# EAGLE board BMS Segment rev15 - Copy (EAGLE 9.6.2)

Size 108 x 240.25 mm. Coordinates in mm from the lower left corner, seen from the top.
Outline: 9,223.93 9,183.93 0,183.93 0,143.99 9,143.99 9,103.99 0,103.99 0,64.05 9,64.05 9,22.77 0,22.77 0,0 95.3,0 95.3,28.7 108,28.7 108,212.82 95.3,212.82 95.3,240.25 0,240.25 0,223.93 9,223.93
Copper layers (1*16): Top 0.035mm / dielectric 1.5mm / Bottom 0.035mm
Design rules "Advanced Circuits (2 Layer) *": minimum track width 5mil, minimum drill 10mil, track to track 5mil, track to pad 5mil, pad to pad 5mil, via to via 5mil, smd to smd 5mil, copper to edge 10mil, drill to drill 6mil, minimum pad ring 7mil, minimum via ring 5mil, stop-mask expansion 2.5mil, vias tented up to drill 30mil, thermal gap 10mil
Net classes: 1 unfused_hv: clearance 0.025 mm to class 0, clearance 3.2 mm

## Footprints (pad centres in the part's own frame; a part is rotated, then mirrored left to right if it is on the bottom)
0603-CAP = smd 0.9 x 0.9: 1 -0.75,0; 2 0.75,0
0603-LED = smd 0.8 x 0.8: 1 -0.825,0; 2 0.825,0
SOT-23 = smd 0.711 x 0.889: 1 -0.94,-1.003; 2 0.94,-1.003; 3 0,1.003
0603-RES = smd 0.9 x 0.8: 1 -0.85,0; 2 0.85,0
PWR163 = smd 1.651 x 3.81: 1 -2.54,-7.366; 2 2.54,-7.366 | smd 7.874 x 8.509: PAD 0,0
0885 = smd 5.6 x 7.23: 1 -5,0; 2 5,0
807-22-001-10-02X101 = drill 0.737 pad 1.829: 1 0,0
MOLEX_NANOFIT_SMD_VERTICAL_02 = smd 1.24 x 7: 1 1.25,0; 2 -1.25,0 | smd 1.1 x 8: PAD 3.055,0; PAD1 -3.055,0
SOT223 = smd 1.2 x 1.6: 1 -2.3,-3.2; 2 0,-3.2; 3 2.3,-3.2 | smd 3.3 x 1.6: 4 0,3.2
HM2102NLT = smd 1.016 x 1.714: 1 -5.016,-6.89; 2 -3.01,-6.89; 3 -1.003,-6.89; 4 1.003,-6.89; 5 3.01,-6.89; 6 5.016,-6.89; 7 5.016,6.89; 8 3.01,6.89; 9 1.003,6.89; 10 -1.003,6.89; 11 -3.01,6.89; 12 -5.016,6.89
LQFP-64 = smd 1.3 x 0.3: 1 -5.75,3.75; 2 -5.75,3.25; 3 -5.75,2.75; 4 -5.75,2.25; 5 -5.75,1.75; 6 -5.75,1.25; 7 -5.75,0.75; 8 -5.75,0.25; 9 -5.75,-0.25; 10 -5.75,-0.75; 11 -5.75,-1.25; 12 -5.75,-1.75; 13 -5.75,-2.25; 14 -5.75,-2.75; 15 -5.75,-3.25; 16 -5.75,-3.75; 33 5.75,-3.75; 34 5.75,-3.25; 35 5.75,-2.75; 36 5.75,-2.25; 37 5.75,-1.75; 38 5.75,-1.25; 39 5.75,-0.75; 40 5.75,-0.25; 41 5.75,0.25; 42 5.75,0.75; 43 5.75,1.25; 44 5.75,1.75; 45 5.75,2.25; 46 5.75,2.75; 47 5.75,3.25; 48 5.75,3.75 | smd 0.3 x 1.3: 17 -3.75,-5.75; 18 -3.25,-5.75; 19 -2.75,-5.75; 20 -2.25,-5.75; 21 -1.75,-5.75; 22 -1.25,-5.75; 23 -0.75,-5.75; 24 -0.25,-5.75; 25 0.25,-5.75; 26 0.75,-5.75; 27 1.25,-5.75; 28 1.75,-5.75; 29 2.25,-5.75; 30 2.75,-5.75; 31 3.25,-5.75; 32 3.75,-5.75; 49 3.75,5.75; 50 3.25,5.75; 51 2.75,5.75; 52 2.25,5.75; 53 1.75,5.75; 54 1.25,5.75; 55 0.75,5.75; 56 0.25,5.75; 57 -0.25,5.75; 58 -0.75,5.75; 59 -1.25,5.75; 60 -1.75,5.75; 61 -2.25,5.75; 62 -2.75,5.75; 63 -3.25,5.75; 64 -3.75,5.75 | smd 5.74 x 5.74: 65 0,0
M4_MOUNTING = hole 4.5: 0,0

## Placement (x,y rotation side)
C1  [0603-CAP]  -134.62,-1016.63 0 top  (outside the outline)
C2  [0603-CAP]  -134.62,-1019.49 0 top  (outside the outline)
C3  [0603-CAP]  -134.62,-1022.35 0 top  (outside the outline)
C4  [0603-CAP]  -134.62,-1025.21 0 top  (outside the outline)
C5  [0603-CAP]  -134.62,-1030.92 0 top  (outside the outline)
C6  [0603-CAP]  -174.62,992.19 0 top  (outside the outline)
C7  [0603-CAP]  -134.62,-1033.78 0 top  (outside the outline)
C8  [0603-CAP]  -134.62,-1036.64 0 top  (outside the outline)
C9  [0603-CAP]  -134.62,-1039.49 0 top  (outside the outline)
C10  [0603-CAP]  -155.57,-1082.04 0 top  (outside the outline)
CELL1:C1  [0603-CAP]  -155.57,-1084.9 0 top  (outside the outline)
CELL1:D1  [0603-LED]  -156.21,-1087.76 0 top  (outside the outline)
CELL1:Q1  TRANSISTOR_P_MOS_SOT23_SI2369DS-T1-GE3  [SOT-23]  -161.29,-1086.8 0 top  (outside the outline)
CELL1:R1  RESISTOR_0603_100  [0603-RES]  -161.29,-1090.61 0 top  (outside the outline)
CELL1:R2  RESISTOR_0603_3.3K  [0603-RES]  -161.93,-1093.47 0 top  (outside the outline)
CELL1:R3  RESISTOR_PWR163_5  [PWR163]  -170.18,-1084.26 0 top  (outside the outline)
CELL1:R4  RESISTOR_0603_1K  [0603-RES]  -173.04,-1096.33 0 top  (outside the outline)
CELL2:C1  [0603-CAP]  -173.04,582.29 0 top  (outside the outline)
CELL2:D1  [0603-LED]  -166.69,582.29 0 top  (outside the outline)
CELL2:Q1  TRANSISTOR_P_MOS_SOT23_SI2369DS-T1-GE3  [SOT-23]  -163.19,566.42 0 top  (outside the outline)
CELL2:R1  RESISTOR_0603_100  [0603-RES]  -173.04,585.15 0 top  (outside the outline)
CELL2:R2  RESISTOR_0603_3.3K  [0603-RES]  -166.69,585.15 0 top  (outside the outline)
CELL2:R3  RESISTOR_PWR163_5  [PWR163]  -170.81,574.99 0 top  (outside the outline)
CELL2:R4  RESISTOR_0603_1K  [0603-RES]  -173.04,588.01 0 top  (outside the outline)
CELL3:C1  [0603-CAP]  -173.04,607.38 0 top  (outside the outline)
CELL3:D1  [0603-LED]  -166.69,607.38 0 top  (outside the outline)
CELL3:Q1  TRANSISTOR_P_MOS_SOT23_SI2369DS-T1-GE3  [SOT-23]  -163.19,591.82 0 top  (outside the outline)
CELL3:R1  RESISTOR_0603_100  [0603-RES]  -173.04,610.24 0 top  (outside the outline)
CELL3:R2  RESISTOR_0603_3.3K  [0603-RES]  -166.69,610.24 0 top  (outside the outline)
CELL3:R3  RESISTOR_PWR163_5  [PWR163]  -170.81,600.08 0 top  (outside the outline)
CELL3:R4  RESISTOR_0603_1K  [0603-RES]  -173.04,613.09 0 top  (outside the outline)
CELL4:C1  [0603-CAP]  -173.04,632.46 0 top  (outside the outline)
CELL4:D1  [0603-LED]  -166.69,632.46 0 top  (outside the outline)
CELL4:Q1  TRANSISTOR_P_MOS_SOT23_SI2369DS-T1-GE3  [SOT-23]  -163.19,616.9 0 top  (outside the outline)
CELL4:R1  RESISTOR_0603_100  [0603-RES]  -173.04,635.32 0 top  (outside the outline)
CELL4:R2  RESISTOR_0603_3.3K  [0603-RES]  -166.69,635.32 0 top  (outside the outline)
CELL4:R3  RESISTOR_PWR163_5  [PWR163]  -170.81,625.16 0 top  (outside the outline)
CELL4:R4  RESISTOR_0603_1K  [0603-RES]  -173.04,638.17 0 top  (outside the outline)
CELL5:C1  [0603-CAP]  -173.04,657.54 0 top  (outside the outline)
CELL5:D1  [0603-LED]  -166.69,657.54 0 top  (outside the outline)
CELL5:Q1  TRANSISTOR_P_MOS_SOT23_SI2369DS-T1-GE3  [SOT-23]  -163.19,641.99 0 top  (outside the outline)
CELL5:R1  RESISTOR_0603_100  [0603-RES]  -173.04,660.4 0 top  (outside the outline)
CELL5:R2  RESISTOR_0603_3.3K  [0603-RES]  -166.69,660.4 0 top  (outside the outline)
CELL5:R3  RESISTOR_PWR163_5  [PWR163]  -170.81,650.24 0 top  (outside the outline)
CELL5:R4  RESISTOR_0603_1K  [0603-RES]  -173.04,663.26 0 top  (outside the outline)
CELL6:C1  [0603-CAP]  -173.04,682.62 0 top  (outside the outline)
CELL6:D1  [0603-LED]  -166.69,682.62 0 top  (outside the outline)
CELL6:Q1  TRANSISTOR_P_MOS_SOT23_SI2369DS-T1-GE3  [SOT-23]  -163.19,667.07 0 top  (outside the outline)
CELL6:R1  RESISTOR_0603_100  [0603-RES]  -173.04,685.48 0 top  (outside the outline)
CELL6:R2  RESISTOR_0603_3.3K  [0603-RES]  -166.69,685.48 0 top  (outside the outline)
CELL6:R3  RESISTOR_PWR163_5  [PWR163]  -170.81,675.32 0 top  (outside the outline)
CELL6:R4  RESISTOR_0603_1K  [0603-RES]  -173.04,688.34 0 top  (outside the outline)
CELL7:C1  [0603-CAP]  -173.04,707.71 0 top  (outside the outline)
CELL7:D1  [0603-LED]  -166.69,707.71 0 top  (outside the outline)
CELL7:Q1  TRANSISTOR_P_MOS_SOT23_SI2369DS-T1-GE3  [SOT-23]  -163.19,692.15 0 top  (outside the outline)
CELL7:R1  RESISTOR_0603_100  [0603-RES]  -173.04,710.57 0 top  (outside the outline)
CELL7:R2  RESISTOR_0603_3.3K  [0603-RES]  -166.69,710.57 0 top  (outside the outline)
CELL7:R3  RESISTOR_PWR163_5  [PWR163]  -170.81,700.4 0 top  (outside the outline)
CELL7:R4  RESISTOR_0603_1K  [0603-RES]  -173.04,713.42 0 top  (outside the outline)
CELL8:C1  [0603-CAP]  -173.04,732.79 0 top  (outside the outline)
CELL8:D1  [0603-LED]  -166.69,732.79 0 top  (outside the outline)
CELL8:Q1  TRANSISTOR_P_MOS_SOT23_SI2369DS-T1-GE3  [SOT-23]  -163.19,717.23 0 top  (outside the outline)
CELL8:R1  RESISTOR_0603_100  [0603-RES]  -173.04,735.65 0 top  (outside the outline)
CELL8:R2  RESISTOR_0603_3.3K  [0603-RES]  -166.69,735.65 0 top  (outside the outline)
CELL8:R3  RESISTOR_PWR163_5  [PWR163]  -170.81,725.49 0 top  (outside the outline)
CELL8:R4  RESISTOR_0603_1K  [0603-RES]  -173.04,738.5 0 top  (outside the outline)
CELL9:C1  [0603-CAP]  -173.04,757.87 0 top  (outside the outline)
CELL9:D1  [0603-LED]  -166.69,757.87 0 top  (outside the outline)
CELL9:Q1  TRANSISTOR_P_MOS_SOT23_SI2369DS-T1-GE3  [SOT-23]  -163.19,742.32 0 top  (outside the outline)
CELL9:R1  RESISTOR_0603_100  [0603-RES]  -173.04,760.73 0 top  (outside the outline)
CELL9:R2  RESISTOR_0603_3.3K  [0603-RES]  -166.69,760.73 0 top  (outside the outline)
CELL9:R3  RESISTOR_PWR163_5  [PWR163]  -170.81,750.57 0 top  (outside the outline)
CELL9:R4  RESISTOR_0603_1K  [0603-RES]  -173.04,763.59 0 top  (outside the outline)
CELL10:C1  [0603-CAP]  -172.4,782.96 0 top  (outside the outline)
CELL10:D1  [0603-LED]  -165.42,782.96 0 top  (outside the outline)
CELL10:Q1  TRANSISTOR_P_MOS_SOT23_SI2369DS-T1-GE3  [SOT-23]  -162.88,767.4 0 top  (outside the outline)
CELL10:R1  RESISTOR_0603_100  [0603-RES]  -172.4,785.81 0 top  (outside the outline)
CELL10:R2  RESISTOR_0603_3.3K  [0603-RES]  -165.42,785.81 0 top  (outside the outline)
CELL10:R3  RESISTOR_PWR163_5  [PWR163]  -170.81,775.65 0 top  (outside the outline)
CELL10:R4  RESISTOR_0603_1K  [0603-RES]  -172.4,788.67 0 top  (outside the outline)
CELL11:C1  [0603-CAP]  -172.4,808.04 0 top  (outside the outline)
CELL11:D1  [0603-LED]  -165.42,808.04 0 top  (outside the outline)
CELL11:Q1  TRANSISTOR_P_MOS_SOT23_SI2369DS-T1-GE3  [SOT-23]  -162.88,792.48 0 top  (outside the outline)
CELL11:R1  RESISTOR_0603_100  [0603-RES]  -172.4,810.89 0 top  (outside the outline)
CELL11:R2  RESISTOR_0603_3.3K  [0603-RES]  -165.42,810.89 0 top  (outside the outline)
CELL11:R3  RESISTOR_PWR163_5  [PWR163]  -170.81,800.74 0 top  (outside the outline)
CELL11:R4  RESISTOR_0603_1K  [0603-RES]  -172.4,813.75 0 top  (outside the outline)
CELL12:C1  [0603-CAP]  -172.4,833.12 0 top  (outside the outline)
CELL12:D1  [0603-LED]  -165.42,833.12 0 top  (outside the outline)
CELL12:Q1  TRANSISTOR_P_MOS_SOT23_SI2369DS-T1-GE3  [SOT-23]  -162.88,817.56 0 top  (outside the outline)
CELL12:R1  RESISTOR_0603_100  [0603-RES]  -172.4,835.98 0 top  (outside the outline)
CELL12:R2  RESISTOR_0603_3.3K  [0603-RES]  -165.42,835.98 0 top  (outside the outline)
CELL12:R3  RESISTOR_PWR163_5  [PWR163]  -170.81,825.82 0 top  (outside the outline)
CELL12:R4  RESISTOR_0603_1K  [0603-RES]  -172.4,838.84 0 top  (outside the outline)
CELL13:C1  [0603-CAP]  -172.4,858.2 0 top  (outside the outline)
CELL13:D1  [0603-LED]  -165.42,858.2 0 top  (outside the outline)
CELL13:Q1  TRANSISTOR_P_MOS_SOT23_SI2369DS-T1-GE3  [SOT-23]  -162.88,842.64 0 top  (outside the outline)
CELL13:R1  RESISTOR_0603_100  [0603-RES]  -172.4,861.06 0 top  (outside the outline)
CELL13:R2  RESISTOR_0603_3.3K  [0603-RES]  -165.42,861.06 0 top  (outside the outline)
CELL13:R3  RESISTOR_PWR163_5  [PWR163]  -170.81,850.9 0 top  (outside the outline)
CELL13:R4  RESISTOR_0603_1K  [0603-RES]  -172.4,863.92 0 top  (outside the outline)
CELL14:C1  [0603-CAP]  -172.4,883.28 0 top  (outside the outline)
CELL14:D1  [0603-LED]  -165.42,883.28 0 top  (outside the outline)
CELL14:Q1  TRANSISTOR_P_MOS_SOT23_SI2369DS-T1-GE3  [SOT-23]  -162.88,867.73 0 top  (outside the outline)
CELL14:R1  RESISTOR_0603_100  [0603-RES]  -172.4,886.14 0 top  (outside the outline)
CELL14:R2  RESISTOR_0603_3.3K  [0603-RES]  -165.42,886.14 0 top  (outside the outline)
CELL14:R3  RESISTOR_PWR163_5  [PWR163]  -170.81,875.98 0 top  (outside the outline)
CELL14:R4  RESISTOR_0603_1K  [0603-RES]  -172.4,889 0 top  (outside the outline)
CELL15:C1  [0603-CAP]  -172.4,908.37 0 top  (outside the outline)
CELL15:D1  [0603-LED]  -165.42,908.37 0 top  (outside the outline)
CELL15:Q1  TRANSISTOR_P_MOS_SOT23_SI2369DS-T1-GE3  [SOT-23]  -162.88,892.81 0 top  (outside the outline)
CELL15:R1  RESISTOR_0603_100  [0603-RES]  -172.4,911.23 0 top  (outside the outline)
CELL15:R2  RESISTOR_0603_3.3K  [0603-RES]  -165.42,911.23 0 top  (outside the outline)
CELL15:R3  RESISTOR_PWR163_5  [PWR163]  -170.81,901.07 0 top  (outside the outline)
CELL15:R4  RESISTOR_0603_1K  [0603-RES]  -172.4,914.08 0 top  (outside the outline)
CELL16:C1  [0603-CAP]  -172.4,933.45 0 top  (outside the outline)
CELL16:D1  [0603-LED]  -165.42,933.45 0 top  (outside the outline)
CELL16:Q1  TRANSISTOR_P_MOS_SOT23_SI2369DS-T1-GE3  [SOT-23]  -162.88,917.89 0 top  (outside the outline)
CELL16:R1  RESISTOR_0603_100  [0603-RES]  -172.4,936.31 0 top  (outside the outline)
CELL16:R2  RESISTOR_0603_3.3K  [0603-RES]  -165.42,936.31 0 top  (outside the outline)
CELL16:R3  RESISTOR_PWR163_5  [PWR163]  -170.81,926.15 0 top  (outside the outline)
CELL16:R4  RESISTOR_0603_1K  [0603-RES]  -172.4,939.16 0 top  (outside the outline)
CELL17:C1  [0603-CAP]  -172.4,958.53 0 top  (outside the outline)
CELL17:D1  [0603-LED]  -165.42,958.53 0 top  (outside the outline)
CELL17:Q1  TRANSISTOR_P_MOS_SOT23_SI2369DS-T1-GE3  [SOT-23]  -162.88,942.98 0 top  (outside the outline)
CELL17:R1  RESISTOR_0603_100  [0603-RES]  -172.4,961.39 0 top  (outside the outline)
CELL17:R2  RESISTOR_0603_3.3K  [0603-RES]  -165.42,961.39 0 top  (outside the outline)
CELL17:R3  RESISTOR_PWR163_5  [PWR163]  -170.81,951.23 0 top  (outside the outline)
CELL17:R4  RESISTOR_0603_1K  [0603-RES]  -172.4,964.25 0 top  (outside the outline)
CELL18:C1  [0603-CAP]  -172.4,983.62 0 top  (outside the outline)
CELL18:D1  [0603-LED]  -165.42,983.62 0 top  (outside the outline)
CELL18:Q1  TRANSISTOR_P_MOS_SOT23_SI2369DS-T1-GE3  [SOT-23]  -162.88,968.06 0 top  (outside the outline)
CELL18:R1  RESISTOR_0603_100  [0603-RES]  -172.4,986.47 0 top  (outside the outline)
CELL18:R2  RESISTOR_0603_3.3K  [0603-RES]  -165.42,986.47 0 top  (outside the outline)
CELL18:R3  RESISTOR_PWR163_5  [PWR163]  -170.81,976.31 0 top  (outside the outline)
CELL18:R4  RESISTOR_0603_1K  [0603-RES]  -172.4,989.33 0 top  (outside the outline)
F0  [0885]  -149.54,-1069.02 0 top  (outside the outline)
F1  [0885]  -149.54,317.5 0 top  (outside the outline)
F2  [0885]  -149.54,327.34 0 top  (outside the outline)
F3  [0885]  -149.54,337.19 0 top  (outside the outline)
F4  [0885]  -149.54,347.03 0 top  (outside the outline)
F5  [0885]  -149.54,356.87 0 top  (outside the outline)
F6  [0885]  -149.54,366.71 0 top  (outside the outline)
F7  [0885]  -149.54,376.56 0 top  (outside the outline)
F8  [0885]  -149.54,386.4 0 top  (outside the outline)
F9  [0885]  -149.54,396.24 0 top  (outside the outline)
F10  [0885]  -149.54,406.08 0 top  (outside the outline)
F11  [0885]  -149.54,415.93 0 top  (outside the outline)
F12  [0885]  -149.54,425.77 0 top  (outside the outline)
F13  [0885]  -149.54,435.61 0 top  (outside the outline)
F14  [0885]  -149.54,445.45 0 top  (outside the outline)
F15  [0885]  -149.54,455.3 0 top  (outside the outline)
F16  [0885]  -149.54,465.14 0 top  (outside the outline)
F17  [0885]  -149.54,474.98 0 top  (outside the outline)
F18  [0885]  -149.54,554.99 0 top  (outside the outline)
J0  CONNECTOR-1  [807-22-001-10-02X101]  -155.57,-1076.01 0 top  (outside the outline)
J1  CONNECTOR-1  [807-22-001-10-02X101]  -156.53,481.96 0 top  (outside the outline)
J2  CONNECTOR-1  [807-22-001-10-02X101]  -156.53,486.09 0 top  (outside the outline)
J3  CONNECTOR-1  [807-22-001-10-02X101]  -156.53,490.22 0 top  (outside the outline)
J4  CONNECTOR-1  [807-22-001-10-02X101]  -156.53,494.35 0 top  (outside the outline)
J5  CONNECTOR-1  [807-22-001-10-02X101]  -156.53,498.48 0 top  (outside the outline)
J6  CONNECTOR-1  [807-22-001-10-02X101]  -156.53,502.6 0 top  (outside the outline)
J7  CONNECTOR-1  [807-22-001-10-02X101]  -156.53,506.73 0 top  (outside the outline)
J8  CONNECTOR-1  [807-22-001-10-02X101]  -156.53,510.86 0 top  (outside the outline)
J9  CONNECTOR-1  [807-22-001-10-02X101]  -156.53,514.99 0 top  (outside the outline)
J10  CONNECTOR-1  [807-22-001-10-02X101]  -156.53,519.11 0 top  (outside the outline)
J11  CONNECTOR-1  [807-22-001-10-02X101]  -156.53,523.24 0 top  (outside the outline)
J12  CONNECTOR-1  [807-22-001-10-02X101]  -156.53,527.37 0 top  (outside the outline)
J13  CONNECTOR-1  [807-22-001-10-02X101]  -156.53,531.5 0 top  (outside the outline)
J14  CONNECTOR-1  [807-22-001-10-02X101]  -156.53,535.62 0 top  (outside the outline)
J15  CONNECTOR-1  [807-22-001-10-02X101]  -156.53,539.75 0 top  (outside the outline)
J16  CONNECTOR-1  [807-22-001-10-02X101]  -156.53,543.88 0 top  (outside the outline)
J17  CONNECTOR-1  [807-22-001-10-02X101]  -156.53,548 0 top  (outside the outline)
J18  CONNECTOR-1  [807-22-001-10-02X101]  -156.53,561.98 0 top  (outside the outline)
J19  [MOLEX_NANOFIT_SMD_VERTICAL_02]  -180.66,-1093.15 0 top  (outside the outline)
J20  [MOLEX_NANOFIT_SMD_VERTICAL_02]  -189.55,-1093.15 0 top  (outside the outline)
J21  [MOLEX_NANOFIT_SMD_VERTICAL_02]  -198.44,-1093.15 0 top  (outside the outline)
J22  [MOLEX_NANOFIT_SMD_VERTICAL_02]  -207.33,-1093.15 0 top  (outside the outline)
J23  [MOLEX_NANOFIT_SMD_VERTICAL_02]  -246.38,1009.65 0 top  (outside the outline)
J24  [MOLEX_NANOFIT_SMD_VERTICAL_02]  -246.38,1020.13 0 top  (outside the outline)
J25  [MOLEX_NANOFIT_SMD_VERTICAL_02]  -246.38,1039.18 0 top  (outside the outline)
J26  [MOLEX_NANOFIT_SMD_VERTICAL_02]  -246.38,1049.65 0 top  (outside the outline)
J27  [MOLEX_NANOFIT_SMD_VERTICAL_02]  -255.27,-1110.3 0 top  (outside the outline)
J28  [MOLEX_NANOFIT_SMD_VERTICAL_02]  -264.16,-1110.3 0 top  (outside the outline)
Q3  [SOT223]  -25.08,-18.41 0 top  (outside the outline)
R1  RESISTOR_0603_100  [0603-RES]  -26.67,-49.85 0 top  (outside the outline)
R2  RESISTOR_0603_60.4  [0603-RES]  -85.41,-216.53 0 top  (outside the outline)
R3  RESISTOR_0603_100  [0603-RES]  -174.62,995.04 0 top  (outside the outline)
R4  RESISTOR_0603_60.4  [0603-RES]  -85.41,-219.39 0 top  (outside the outline)
R5  RESISTOR_0603_60.4  [0603-RES]  -85.41,-222.25 0 top  (outside the outline)
R6  RESISTOR_0603_60.4  [0603-RES]  -85.41,-225.11 0 top  (outside the outline)
R7  RESISTOR_0603_100  [0603-RES]  -155.57,-1079.18 0 top  (outside the outline)
R8  RESISTOR_0603_1K  [0603-RES]  -85.41,-176.85 0 top  (outside the outline)
R9  RESISTOR_0603_1K  [0603-RES]  -85.41,-179.71 0 top  (outside the outline)
RT1  THERMISTOR  [0603-RES]  -244.79,-1099.18 0 top  (outside the outline)
RT2  THERMISTOR  [0603-RES]  -249.24,1093.15 0 top  (outside the outline)
RT3  THERMISTOR  [0603-RES]  -249.24,1104.58 0 top  (outside the outline)
T1  TRANSFORMERHM2102NLT  [HM2102NLT]  -79.06,-206.38 0 top  (outside the outline)
THERM1:C1  [0603-CAP]  -244.79,-1107.76 0 top  (outside the outline)
THERM1:R1  RESISTOR_0603_100  [0603-RES]  -246.06,-1110.62 0 top  (outside the outline)
THERM1:R2  RESISTOR_0603_10K  [0603-RES]  -247.33,-1113.47 0 top  (outside the outline)
THERM2:C1  [0603-CAP]  -247.33,997.9 0 top  (outside the outline)
THERM2:R1  RESISTOR_0603_100  [0603-RES]  -247.33,1000.76 0 top  (outside the outline)
THERM2:R2  RESISTOR_0603_10K  [0603-RES]  -247.33,1003.62 0 top  (outside the outline)
THERM3:C1  [0603-CAP]  -238.44,1016.95 0 top  (outside the outline)
THERM3:R1  RESISTOR_0603_100  [0603-RES]  -240.35,1027.43 0 top  (outside the outline)
THERM3:R2  RESISTOR_0603_10K  [0603-RES]  -247.33,1030.29 0 top  (outside the outline)
THERM4:C1  [0603-CAP]  -247.33,1027.43 0 top  (outside the outline)
THERM4:R1  RESISTOR_0603_100  [0603-RES]  -240.35,1030.29 0 top  (outside the outline)
THERM4:R2  RESISTOR_0603_10K  [0603-RES]  -247.33,1033.14 0 top  (outside the outline)
THERM5:C1  [0603-CAP]  -238.44,1046.48 0 top  (outside the outline)
THERM5:R1  RESISTOR_0603_100  [0603-RES]  -240.35,1056.96 0 top  (outside the outline)
THERM5:R2  RESISTOR_0603_10K  [0603-RES]  -247.33,1059.82 0 top  (outside the outline)
THERM6:C1  [0603-CAP]  -247.33,1056.96 0 top  (outside the outline)
THERM6:R1  RESISTOR_0603_100  [0603-RES]  -240.35,1059.82 0 top  (outside the outline)
THERM6:R2  RESISTOR_0603_10K  [0603-RES]  -247.33,1062.67 0 top  (outside the outline)
THERM7:C1  [0603-CAP]  -247.33,1076.01 0 top  (outside the outline)
THERM7:R1  RESISTOR_0603_100  [0603-RES]  -247.33,1078.87 0 top  (outside the outline)
THERM7:R2  RESISTOR_0603_10K  [0603-RES]  -247.33,1081.72 0 top  (outside the outline)
THERM8:C1  [0603-CAP]  -247.33,1084.58 0 top  (outside the outline)
THERM8:R1  RESISTOR_0603_100  [0603-RES]  -247.33,1087.44 0 top  (outside the outline)
THERM8:R2  RESISTOR_0603_10K  [0603-RES]  -247.33,1090.3 0 top  (outside the outline)
THERM9:C1  [0603-CAP]  -247.33,1096.01 0 top  (outside the outline)
THERM9:R1  RESISTOR_0603_100  [0603-RES]  -247.33,1098.87 0 top  (outside the outline)
THERM9:R2  RESISTOR_0603_10K  [0603-RES]  -247.33,1101.72 0 top  (outside the outline)
U1  LTC6813  [LQFP-64]  -112.39,-227.65 0 top  (outside the outline)
U$9  [M4_MOUNTING]  53.85,170.69 0 top
U$10  [M4_MOUNTING]  5,178.94 0 top
U$11  [M4_MOUNTING]  5,98.99 0 top
U$12  [M4_MOUNTING]  5,69.05 0 top
U$13  [M4_MOUNTING]  5,11.67 0 top
U$14  [M4_MOUNTING]  101.65,38.11 0 top
U$15  [M4_MOUNTING]  103.65,201.99 0 top
U$16  [M4_MOUNTING]  103.65,158.99 0 top
U$17  [M4_MOUNTING]  101.65,88.99 0 top
U$18  [M4_MOUNTING]  53.85,72.14 0 top
U$19  [M4_MOUNTING]  53.85,121.41 0 top
U$26  [M4_MOUNTING]  5,234.28 0 top
U$27  [M4_MOUNTING]  5,148.99 0 top

## Library data of the parts
C1-C3 = HyTechDevices; CAPACITANCE: 1µF; DKPN: 311-1796-1-ND; MANUFACTURER: Yageo; MOPN: 603-CC603KRX7R6BB105; MPN: CC0603KRX7R6BB105; VOLTAGE: 10V
C4 C6 = HyTechDevices; CAPACITANCE: 0.1µF; DKPN: 311-1523-1-ND; MANUFACTURER: Yageo; MOPN: 603-CC603KRX7R0BB104; MPN: CC0603KRX7R0BB104; VOLTAGE: 100V
C5 C7-C9 = HyTechDevices; CAPACITANCE: 10nF; DKPN: 311-4054-1-ND; MANUFACTURER: Yageo; MOPN: 603-CC603KRX7R6BB103; MPN: CC0603KRX7R6BB103; VOLTAGE: 10V
C10 CELL1:C1 CELL2:C1 CELL3:C1 CELL4:C1 CELL5:C1 CELL6:C1 CELL7:C1 CELL8:C1 CELL9:C1 CELL10:C1 CELL11:C1 CELL12:C1 CELL13:C1 CELL14:C1 CELL15:C1 CELL16:C1 CELL17:C1 CELL18:C1 THERM1:C1 THERM2:C1 THERM3:C1 THERM4:C1 THERM5:C1 THERM6:C1 THERM7:C1 THERM8:C1 THERM9:C1 = HyTechDevices; CAPACITANCE: 10nF; DKPN: 311-1788-1-ND; MANUFACTURER: Yageo; MOPN: 603-CC603KRX7R0BB103; MPN: CC0603KRX7R0BB103; VOLTAGE: 100V
CELL1:D1 CELL2:D1 CELL3:D1 CELL4:D1 CELL5:D1 CELL6:D1 CELL7:D1 CELL8:D1 CELL9:D1 CELL10:D1 CELL11:D1 CELL12:D1 CELL13:D1 CELL14:D1 CELL15:D1 CELL16:D1 CELL17:D1 CELL18:D1 = HyTechDevices; COLOR: RED; DKPN: 754-1786-1-ND; MANUFACTURER: Kingbright; MOPN: 604-APT1608SECKJ3PRV; MPN: APT1608SECK/J3-PRV
CELL1:Q1 CELL2:Q1 CELL3:Q1 CELL4:Q1 CELL5:Q1 CELL6:Q1 CELL7:Q1 CELL8:Q1 CELL9:Q1 CELL10:Q1 CELL11:Q1 CELL12:Q1 CELL13:Q1 CELL14:Q1 CELL15:Q1 CELL16:Q1 CELL17:Q1 CELL18:Q1 = HyTechDevices; DKPN: SI2369DS-T1-GE3CT-ND; MANUFACTURER: Vishay Siliconix; MOPN: 78-SI2369DS-T1-GE3; MPN: SI2369DS-T1-GE3
CELL1:R1 CELL2:R1 CELL3:R1 CELL4:R1 CELL5:R1 CELL6:R1 CELL7:R1 CELL8:R1 CELL9:R1 CELL10:R1 CELL11:R1 CELL12:R1 CELL13:R1 CELL14:R1 CELL15:R1 CELL16:R1 CELL17:R1 CELL18:R1 R1 R3 R7 THERM1:R1 THERM2:R1 THERM3:R1 THERM4:R1 THERM5:R1 THERM6:R1 THERM7:R1 THERM8:R1 THERM9:R1 = HyTechDevices; DKPN: 311-100HRCT-ND; MANUFACTURER: Yageo; MOPN: 603-RC0603FR-07100RL; MPN: RC0603FR-07100RL; POWER: 0.1W; RESISTANCE: 100; TOLERANCE: 1%; VOLTAGE: 75V
CELL1:R2 CELL2:R2 CELL3:R2 CELL4:R2 CELL5:R2 CELL6:R2 CELL7:R2 CELL8:R2 CELL9:R2 CELL10:R2 CELL11:R2 CELL12:R2 CELL13:R2 CELL14:R2 CELL15:R2 CELL16:R2 CELL17:R2 CELL18:R2 = HyTechDevices; DKPN: 311-3.30KHRCT-ND; MANUFACTURER: Yageo; MOPN: 603-RC0603FR-073K3L; MPN: RC0603FR-073K3L; POWER: 0.1W; RESISTANCE: 3.3k; TOLERANCE: 1%; VOLTAGE: 75V
CELL1:R3 CELL2:R3 CELL3:R3 CELL4:R3 CELL5:R3 CELL6:R3 CELL7:R3 CELL8:R3 CELL9:R3 CELL10:R3 CELL11:R3 CELL12:R3 CELL13:R3 CELL14:R3 CELL15:R3 CELL16:R3 CELL17:R3 CELL18:R3 = HyTechDevices; DKPN: PWR163S-25-5R00FECT-ND; MANUFACTURER: Bourns Inc.; MOPN: 652-PWR163S255R00FE; MPN: PWR163S-25-5R00FE; POWER: 25W; RESISTANCE: 5; TOLERANCE: 1%; VOLTAGE: 2000V
CELL1:R4 CELL2:R4 CELL3:R4 CELL4:R4 CELL5:R4 CELL6:R4 CELL7:R4 CELL8:R4 CELL9:R4 CELL10:R4 CELL11:R4 CELL12:R4 CELL13:R4 CELL14:R4 CELL15:R4 CELL16:R4 CELL17:R4 CELL18:R4 R8 R9 = HyTechDevices; DKPN: 311-1.00KHRCT-ND; MANUFACTURER: Yageo; MOPN: 603-RC0603FR-071KL; MPN: RC0603FR-071KL; POWER: 0.1W; RESISTANCE: 1k; TOLERANCE: 1%; VOLTAGE: 75V
F0 F1-F18 = HyTechDevices; CURRENT: 1.25A; DKPN: F10986CT-ND; MANUFACTURER: Littelfuse Inc.; MOPN: 576-08851.25DR; MPN: 08851.25DR
J0 J1-J18 = HyTechDevices; DKPN: 807-22-001-10-022101-ND; MANUFACTURER: Mill-Max Manufacturing Corp.; MODEL: POGO-PIN; MOPN: 575-8072200110022101; MPN: 807-22-001-10-022101
J19 J21-J26 = HyTechDevices; MANUFACTURER: Molex; MODEL: NF_S_V_B; MPN: 1054291304
J20 J27 J28 = HyTechDevices; MANUFACTURER: Molex; MODEL: NF_S_V_N; MPN: 1054312302
Q3 = HyTechDevices; DKPN: NSV1C201MZ4T1GOSCT-ND; MANUFACTURER: ON Semiconductor; MOPN: 863-NSV1C201MZ4T1G; MPN: NSV1C201MZ4
R2 R4-R6 = HyTechDevices; DKPN: 311-60.4HRCT-ND; MANUFACTURER: Yageo; MOPN: 603-RC0603FR-0760R4L; MPN: RC0603FR-0760R4L; POWER: 0.1W; RESISTANCE: 60.4; TOLERANCE: 1%; VOLTAGE: 75V
RT1-RT3 = HyTechDevices; DKPN: 490-18147-1-ND; MANUFACTURER: Murata Electronics; MOPN: 81-NCU18XH103D60RB; MPN: NCU18XH103D60RB; RESISTANCE: 10k
T1 = HyTechDevices; DKPN: 1840-1034-1-ND; MANUFACTURER: Pulse Electronics Network; MOPN: 673-HM2102NLT; MPN: HM2102NLT
THERM1:R2 THERM2:R2 THERM3:R2 THERM4:R2 THERM5:R2 THERM6:R2 THERM7:R2 THERM8:R2 THERM9:R2 = HyTechDevices; DKPN: 311-10.0KHRCT-ND; MANUFACTURER: Yageo; MOPN: 603-RC0603FR-0710KL; MPN: RC0603FR-0710KL; POWER: 0.1W; RESISTANCE: 10k; TOLERANCE: 1%; VOLTAGE: 75V
U1 = HyTechDevices; DKPN: LTC6813ILWE-1#3ZZPBF-ND; MANUFACTURER: Analog Devices Inc.; MPN: LTC6813ILWE-1#3ZZPBF
U$9-U$19 U$26 U$27 = HyTechDevices

## Nets
C0: C10.1 R7.2 U1.38
C1: CELL1:C1.1 CELL1:R1.2 U1.36
C2: CELL2:C1.1 CELL2:R1.2 U1.34
C3: CELL3:C1.1 CELL3:R1.2 U1.32
C4: CELL4:C1.1 CELL4:R1.2 U1.30
C5: CELL5:C1.1 CELL5:R1.2 U1.28
C6: CELL6:C1.1 CELL6:R1.2 U1.26
C7: CELL7:C1.1 CELL7:R1.2 U1.24
C8: CELL8:C1.1 CELL8:R1.2 U1.22
C9: CELL9:C1.1 CELL9:R1.2 U1.20
C10: CELL10:C1.1 CELL10:R1.2 U1.18
C11: CELL11:C1.1 CELL11:R1.2 U1.16
C12: CELL12:C1.1 CELL12:R1.2 U1.14
C13: CELL13:C1.1 CELL13:R1.2 U1.12
C14: CELL14:C1.1 CELL14:R1.2 U1.10
C15: CELL15:C1.1 CELL15:R1.2 U1.8
C16: CELL16:C1.1 CELL16:R1.2 U1.6
C17: CELL17:C1.1 CELL17:R1.2 U1.4
C18: CELL18:C1.1 CELL18:R1.2 R1.2 R3.1 U1.2
CC0: F0.1 J0.1
CC1: F1.1 J1.1
CC2: F2.1 J2.1
CC3: F3.1 J3.1
CC4: F4.1 J4.1
CC5: F5.1 J5.1
CC6: F6.1 J6.1
CC7: F7.1 J7.1
CC8: F8.1 J8.1
CC9: F9.1 J9.1
CC10: F10.1 J10.1
CC11: F11.1 J11.1
CC12: F12.1 J12.1
CC13: F13.1 J13.1
CC14: F14.1 J14.1
CC15: F15.1 J15.1
CC16: F16.1 J16.1
CC17: F17.1 J17.1
CC18: F18.1 J18.1
CELL1:N$5: CELL1:Q1.1 CELL1:R2.1
CELL1:N$6: CELL1:D1.2 CELL1:Q1.3 CELL1:R3.2
CELL1:N$7: CELL1:D1.1 CELL1:R4.2
CELL2:N$5: CELL2:Q1.1 CELL2:R2.1
CELL2:N$6: CELL2:D1.2 CELL2:Q1.3 CELL2:R3.2
CELL2:N$7: CELL2:D1.1 CELL2:R4.2
CELL3:N$5: CELL3:Q1.1 CELL3:R2.1
CELL3:N$6: CELL3:D1.2 CELL3:Q1.3 CELL3:R3.2
CELL3:N$7: CELL3:D1.1 CELL3:R4.2
CELL4:N$5: CELL4:Q1.1 CELL4:R2.1
CELL4:N$6: CELL4:D1.2 CELL4:Q1.3 CELL4:R3.2
CELL4:N$7: CELL4:D1.1 CELL4:R4.2
CELL5:N$5: CELL5:Q1.1 CELL5:R2.1
CELL5:N$6: CELL5:D1.2 CELL5:Q1.3 CELL5:R3.2
CELL5:N$7: CELL5:D1.1 CELL5:R4.2
CELL6:N$5: CELL6:Q1.1 CELL6:R2.1
CELL6:N$6: CELL6:D1.2 CELL6:Q1.3 CELL6:R3.2
CELL6:N$7: CELL6:D1.1 CELL6:R4.2
CELL7:N$5: CELL7:Q1.1 CELL7:R2.1
CELL7:N$6: CELL7:D1.2 CELL7:Q1.3 CELL7:R3.2
CELL7:N$7: CELL7:D1.1 CELL7:R4.2
CELL8:N$5: CELL8:Q1.1 CELL8:R2.1
CELL8:N$6: CELL8:D1.2 CELL8:Q1.3 CELL8:R3.2
CELL8:N$7: CELL8:D1.1 CELL8:R4.2
CELL9:N$5: CELL9:Q1.1 CELL9:R2.1
CELL9:N$6: CELL9:D1.2 CELL9:Q1.3 CELL9:R3.2
CELL9:N$7: CELL9:D1.1 CELL9:R4.2
CELL10:N$5: CELL10:Q1.1 CELL10:R2.1
CELL10:N$6: CELL10:D1.2 CELL10:Q1.3 CELL10:R3.2
CELL10:N$7: CELL10:D1.1 CELL10:R4.2
CELL11:N$5: CELL11:Q1.1 CELL11:R2.1
CELL11:N$6: CELL11:D1.2 CELL11:Q1.3 CELL11:R3.2
CELL11:N$7: CELL11:D1.1 CELL11:R4.2
CELL12:N$5: CELL12:Q1.1 CELL12:R2.1
CELL12:N$6: CELL12:D1.2 CELL12:Q1.3 CELL12:R3.2
CELL12:N$7: CELL12:D1.1 CELL12:R4.2
CELL13:N$5: CELL13:Q1.1 CELL13:R2.1
CELL13:N$6: CELL13:D1.2 CELL13:Q1.3 CELL13:R3.2
CELL13:N$7: CELL13:D1.1 CELL13:R4.2
CELL14:N$5: CELL14:Q1.1 CELL14:R2.1
CELL14:N$6: CELL14:D1.2 CELL14:Q1.3 CELL14:R3.2
CELL14:N$7: CELL14:D1.1 CELL14:R4.2
CELL15:N$5: CELL15:Q1.1 CELL15:R2.1
CELL15:N$6: CELL15:D1.2 CELL15:Q1.3 CELL15:R3.2
CELL15:N$7: CELL15:D1.1 CELL15:R4.2
CELL16:N$5: CELL16:Q1.1 CELL16:R2.1
CELL16:N$6: CELL16:D1.2 CELL16:Q1.3 CELL16:R3.2
CELL16:N$7: CELL16:D1.1 CELL16:R4.2
CELL17:N$5: CELL17:Q1.1 CELL17:R2.1
CELL17:N$6: CELL17:D1.2 CELL17:Q1.3 CELL17:R3.2
CELL17:N$7: CELL17:D1.1 CELL17:R4.2
CELL18:N$5: CELL18:Q1.1 CELL18:R2.1
CELL18:N$6: CELL18:D1.2 CELL18:Q1.3 CELL18:R3.2
CELL18:N$7: CELL18:D1.1 CELL18:R4.2
GPIO1: J28.1 U1.39
GPIO1_PRE: J28.2 THERM1:C1.1 THERM1:R1.1
GPIO2: THERM2:C1.1 THERM2:R1.1 U1.40
GPIO3: THERM3:C1.1 THERM3:R1.1 U1.41
GPIO4: THERM4:C1.1 THERM4:R1.1 U1.42
GPIO5: THERM5:C1.1 THERM5:R1.1 U1.43
GPIO6: THERM6:C1.1 THERM6:R1.1 U1.44
GPIO7: THERM7:C1.1 THERM7:R1.1 U1.45
GPIO8: THERM8:C1.1 THERM8:R1.1 U1.46
GPIO9: THERM9:C1.1 THERM9:R1.1 U1.47
IMA: R6.1 T1.9 U1.61
IMB: R2.1 T1.12 U1.63
IPA: R5.2 T1.7 U1.62
IPB: R4.2 T1.10 U1.64
ISO_IMA: J19.2 T1.4
ISO_IMB: J20.2 T1.1
ISO_IPA: J19.1 T1.6
ISO_IPB: J20.1 T1.3
N$1: R8.1 R9.2 U1.58
N$2: R8.2 U1.57
N$5: C8.2 R5.1 R6.2
N$6: C5.1 T1.11
N$11: Q3.1 U1.49
N$12: C3.1 Q3.3 U1.48 U1.52 U1.55
N$15: C4.1 Q3.2 Q3.4 R1.1
N$17: C7.1 T1.8
N$18: C9.2 R2.2 R4.1
N$25: C2.1 U1.51
S1: CELL1:R2.2 U1.37
S2: CELL2:R2.2 U1.35
S3: CELL3:R2.2 U1.33
S4: CELL4:R2.2 U1.31
S5: CELL5:R2.2 U1.29
S6: CELL6:R2.2 U1.27
S7: CELL7:R2.2 U1.25
S8: CELL8:R2.2 U1.23
S9: CELL9:R2.2 U1.21
S10: CELL10:R2.2 U1.19
S11: CELL11:R2.2 U1.17
S12: CELL12:R2.2 U1.15
S13: CELL13:R2.2 U1.13
S14: CELL14:R2.2 U1.11
S15: CELL15:R2.2 U1.9
S16: CELL16:R2.2 U1.7
S17: CELL17:R2.2 U1.5
S18: CELL18:R2.2 U1.3
SENSE1: CELL1:Q1.2 CELL1:R1.1 CELL2:R3.1 CELL2:R4.1 F1.2
SENSE2: CELL2:Q1.2 CELL2:R1.1 CELL3:R3.1 CELL3:R4.1 F2.2
SENSE3: CELL3:Q1.2 CELL3:R1.1 CELL4:R3.1 CELL4:R4.1 F3.2
SENSE4: CELL4:Q1.2 CELL4:R1.1 CELL5:R3.1 CELL5:R4.1 F4.2
SENSE5: CELL5:Q1.2 CELL5:R1.1 CELL6:R3.1 CELL6:R4.1 F5.2
SENSE6: CELL6:Q1.2 CELL6:R1.1 CELL7:R3.1 CELL7:R4.1 F6.2
SENSE7: CELL7:Q1.2 CELL7:R1.1 CELL8:R3.1 CELL8:R4.1 F7.2
SENSE8: CELL8:Q1.2 CELL8:R1.1 CELL9:R3.1 CELL9:R4.1 F8.2
SENSE9: CELL9:Q1.2 CELL9:R1.1 CELL10:R3.1 CELL10:R4.1 F9.2
SENSE10: CELL10:Q1.2 CELL10:R1.1 CELL11:R3.1 CELL11:R4.1 F10.2
SENSE11: CELL11:Q1.2 CELL11:R1.1 CELL12:R3.1 CELL12:R4.1 F11.2
SENSE12: CELL12:Q1.2 CELL12:R1.1 CELL13:R3.1 CELL13:R4.1 F12.2
SENSE13: CELL13:Q1.2 CELL13:R1.1 CELL14:R3.1 CELL14:R4.1 F13.2
SENSE14: CELL14:Q1.2 CELL14:R1.1 CELL15:R3.1 CELL15:R4.1 F14.2
SENSE15: CELL15:Q1.2 CELL15:R1.1 CELL16:R3.1 CELL16:R4.1 F15.2
SENSE16: CELL16:Q1.2 CELL16:R1.1 CELL17:R3.1 CELL17:R4.1 F16.2
SENSE17: CELL17:Q1.2 CELL17:R1.1 CELL18:R3.1 CELL18:R4.1 J27.2
SENSE17_PRE: F17.2 J27.1
SENSE18: CELL18:Q1.2 CELL18:R1.1 F18.2
THERM1: J21.1 THERM1:R1.2 THERM1:R2.1
THERM2: J22.1 THERM2:R1.2 THERM2:R2.1
THERM3: J23.1 THERM3:R1.2 THERM3:R2.1
THERM4: J24.1 THERM4:R1.2 THERM4:R2.1
THERM5: J25.1 THERM5:R1.2 THERM5:R2.1
THERM6: J26.1 THERM6:R1.2 THERM6:R2.1
THERM7: RT1.2 THERM7:R1.2 THERM7:R2.1
THERM8: RT2.2 THERM8:R1.2 THERM8:R2.1
THERM9: RT3.2 THERM9:R1.2 THERM9:R2.1
V+: C6.1 R3.2 U1.1
V-: C1.2 C2.2 C3.2 C4.2 C5.2 C6.2 C7.2 C8.1 C9.1 C10.2 CELL1:C1.2 CELL1:R3.1 CELL1:R4.1 CELL2:C1.2 CELL3:C1.2 CELL4:C1.2 CELL5:C1.2 CELL6:C1.2 CELL7:C1.2 CELL8:C1.2 CELL9:C1.2 CELL10:C1.2 CELL11:C1.2 CELL12:C1.2 CELL13:C1.2 CELL14:C1.2 CELL15:C1.2 CELL16:C1.2 CELL17:C1.2 CELL18:C1.2 F0.2 J21.2 J22.2 J23.2 J24.2 J25.2 J26.2 R7.1 R9.1 RT1.1 RT2.1 RT3.1 THERM1:C1.2 THERM2:C1.2 THERM3:C1.2 THERM4:C1.2 THERM5:C1.2 THERM6:C1.2 THERM7:C1.2 THERM8:C1.2 THERM9:C1.2 U1.59 U1.60 U1.65
VREF2: C1.1 THERM1:R2.2 THERM2:R2.2 THERM3:R2.2 THERM4:R2.2 THERM5:R2.2 THERM6:R2.2 THERM7:R2.2 THERM8:R2.2 THERM9:R2.2 U1.50

## Tracks (layer width: path | path; a pad name or v marks a point on that pad's centre or on a via)
C0  (2 unrouted)
C1  (2 unrouted)
C2  (2 unrouted)
C3  (2 unrouted)
C4  (2 unrouted)
C5  (2 unrouted)
C6  (2 unrouted)
C7  (2 unrouted)
C8  (2 unrouted)
C9  (2 unrouted)
C10  (2 unrouted)
C11  (2 unrouted)
C12  (2 unrouted)
C13  (2 unrouted)
C14  (2 unrouted)
C15  (2 unrouted)
C16  (2 unrouted)
C17  (2 unrouted)
C18  (4 unrouted)
CC0  (1 unrouted)
CC1  (1 unrouted)
CC2  (1 unrouted)
CC3  (1 unrouted)
CC4  (1 unrouted)
CC5  (1 unrouted)
CC6  (1 unrouted)
CC7  (1 unrouted)
CC8  (1 unrouted)
CC9  (1 unrouted)
CC10  (1 unrouted)
CC11  (1 unrouted)
CC12  (1 unrouted)
CC13  (1 unrouted)
CC14  (1 unrouted)
CC15  (1 unrouted)
CC16  (1 unrouted)
CC17  (1 unrouted)
CC18  (1 unrouted)
CELL1:N$5  (1 unrouted)
CELL1:N$6  (2 unrouted)
CELL1:N$7  (1 unrouted)
CELL2:N$5  (1 unrouted)
CELL2:N$6  (2 unrouted)
CELL2:N$7  (1 unrouted)
CELL3:N$5  (1 unrouted)
CELL3:N$6  (2 unrouted)
CELL3:N$7  (1 unrouted)
CELL4:N$5  (1 unrouted)
CELL4:N$6  (2 unrouted)
CELL4:N$7  (1 unrouted)
CELL5:N$5  (1 unrouted)
CELL5:N$6  (2 unrouted)
CELL5:N$7  (1 unrouted)
CELL6:N$5  (1 unrouted)
CELL6:N$6  (2 unrouted)
CELL6:N$7  (1 unrouted)
CELL7:N$5  (1 unrouted)
CELL7:N$6  (2 unrouted)
CELL7:N$7  (1 unrouted)
CELL8:N$5  (1 unrouted)
CELL8:N$6  (2 unrouted)
CELL8:N$7  (1 unrouted)
CELL9:N$5  (1 unrouted)
CELL9:N$6  (2 unrouted)
CELL9:N$7  (1 unrouted)
CELL10:N$5  (1 unrouted)
CELL10:N$6  (2 unrouted)
CELL10:N$7  (1 unrouted)
CELL11:N$5  (1 unrouted)
CELL11:N$6  (2 unrouted)
CELL11:N$7  (1 unrouted)
CELL12:N$5  (1 unrouted)
CELL12:N$6  (2 unrouted)
CELL12:N$7  (1 unrouted)
CELL13:N$5  (1 unrouted)
CELL13:N$6  (2 unrouted)
CELL13:N$7  (1 unrouted)
CELL14:N$5  (1 unrouted)
CELL14:N$6  (2 unrouted)
CELL14:N$7  (1 unrouted)
CELL15:N$5  (1 unrouted)
CELL15:N$6  (2 unrouted)
CELL15:N$7  (1 unrouted)
CELL16:N$5  (1 unrouted)
CELL16:N$6  (2 unrouted)
CELL16:N$7  (1 unrouted)
CELL17:N$5  (1 unrouted)
CELL17:N$6  (2 unrouted)
CELL17:N$7  (1 unrouted)
CELL18:N$5  (1 unrouted)
CELL18:N$6  (2 unrouted)
CELL18:N$7  (1 unrouted)
GPIO1  (1 unrouted)
GPIO1_PRE  (2 unrouted)
GPIO2  (2 unrouted)
GPIO3  (2 unrouted)
GPIO4  (2 unrouted)
GPIO5  (2 unrouted)
GPIO6  (2 unrouted)
GPIO7  (2 unrouted)
GPIO8  (2 unrouted)
GPIO9  (2 unrouted)
IMA  (2 unrouted)
IMB  (2 unrouted)
IPA  (2 unrouted)
IPB  (2 unrouted)
ISO_IMA  (1 unrouted)
ISO_IMB  (1 unrouted)
ISO_IPA  (1 unrouted)
ISO_IPB  (1 unrouted)
N$1  (2 unrouted)
N$2  (1 unrouted)
N$5  (2 unrouted)
N$6  (1 unrouted)
N$11  (1 unrouted)
N$12  (4 unrouted)
N$15  (3 unrouted)
N$17  (1 unrouted)
N$18  (2 unrouted)
N$25  (1 unrouted)
S1  (1 unrouted)
S2  (1 unrouted)
S3  (1 unrouted)
S4  (1 unrouted)
S5  (1 unrouted)
S6  (1 unrouted)
S7  (1 unrouted)
S8  (1 unrouted)
S9  (1 unrouted)
S10  (1 unrouted)
S11  (1 unrouted)
S12  (1 unrouted)
S13  (1 unrouted)
S14  (1 unrouted)
S15  (1 unrouted)
S16  (1 unrouted)
S17  (1 unrouted)
S18  (1 unrouted)
SENSE1  (4 unrouted)
SENSE2  (4 unrouted)
SENSE3  (4 unrouted)
SENSE4  (4 unrouted)
SENSE5  (4 unrouted)
SENSE6  (4 unrouted)
SENSE7  (4 unrouted)
SENSE8  (4 unrouted)
SENSE9  (4 unrouted)
SENSE10  (4 unrouted)
SENSE11  (4 unrouted)
SENSE12  (4 unrouted)
SENSE13  (4 unrouted)
SENSE14  (4 unrouted)
SENSE15  (4 unrouted)
SENSE16  (4 unrouted)
SENSE17  (4 unrouted)
SENSE17_PRE  (1 unrouted)
SENSE18  (2 unrouted)
THERM1  (2 unrouted)
THERM2  (2 unrouted)
THERM3  (2 unrouted)
THERM4  (2 unrouted)
THERM5  (2 unrouted)
THERM6  (2 unrouted)
THERM7  (2 unrouted)
THERM8  (2 unrouted)
THERM9  (2 unrouted)
V+  (2 unrouted)
V-  (53 unrouted)
VREF2  (10 unrouted)

## Text on the board
tDocu: Cell 17 | + | 17 | 16 | V-_A | 15 | DANGER HIGH VOLTAGE | x8 | x4 | x2 | x1 | 1 | 0 | 1 | 0 | 1 | 0 | 1 | 0 | 14 | 13 | 12 | DRIVE_A | 11 | TS | isoSPI | 10 | 9 | TS | isoSPI | 8 | 7 | x8 | x4 | x2 | x1 | 1 | 0 | 1 | 0 | 1 | 0 | 1 | 0 | 6 | V-_B | 5 | 4 | 3 | DANGER HIGH VOLTAGE | DRIVE_B | 2 | 1 | HyTech Racing 2020 / BMS Segment rev14 / Designed by Arvind Srinivasan, / based on rev10 by Yvonne Yeh | 0 | # | - | Cell 0
bDocu: DANGER HIGH VOLTAGE | TS | isoSPI | TS | isoSPI | DANGER HIGH VOLTAGE